# Altium PCB PCB1.PcbDoc
Units mm, origin at the board's own origin, x right, y up, seen from the top; angles counter-clockwise.
Board outline 12 x 15 mm, 4 copper layers (Component Side, Ground Plane, Power Plane, Solder Side), stack 1.494 mm thick; 2 components, 38 nets, 108 pads, 46 vias.
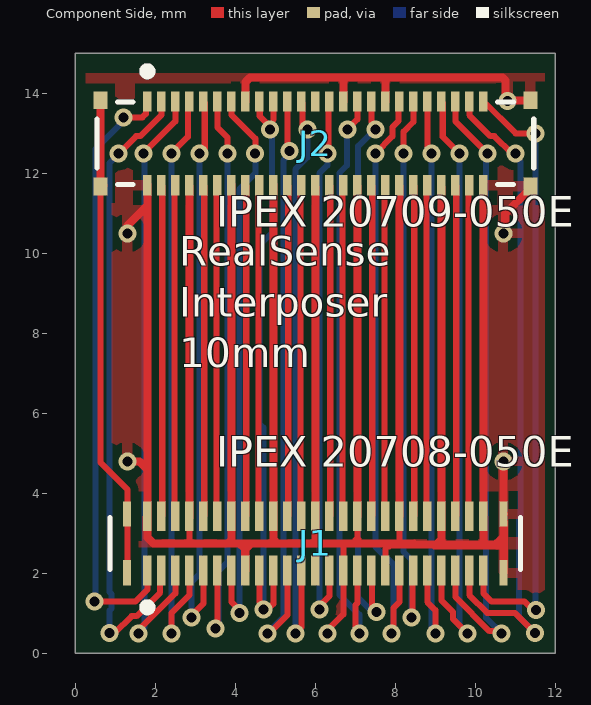
[diagram p0: Component Side view]
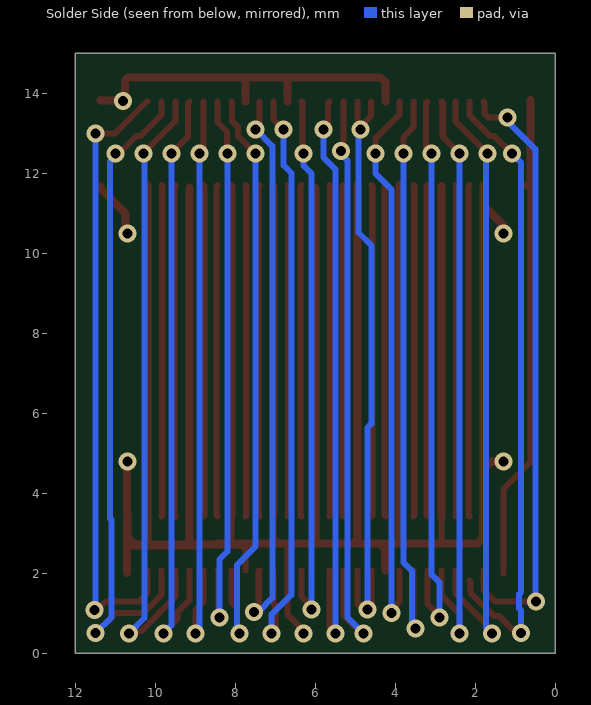
[diagram p1: Solder Side view, seen from below]
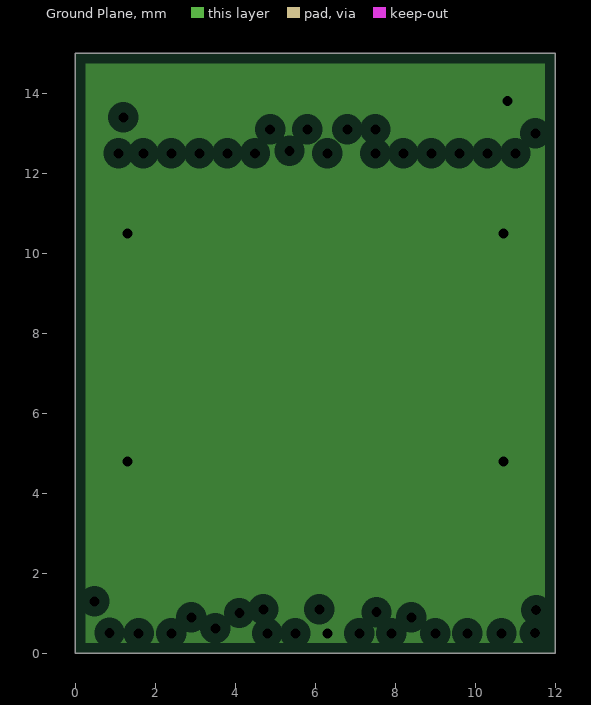
[diagram p2: Ground Plane, clearances drawn from the general rule]
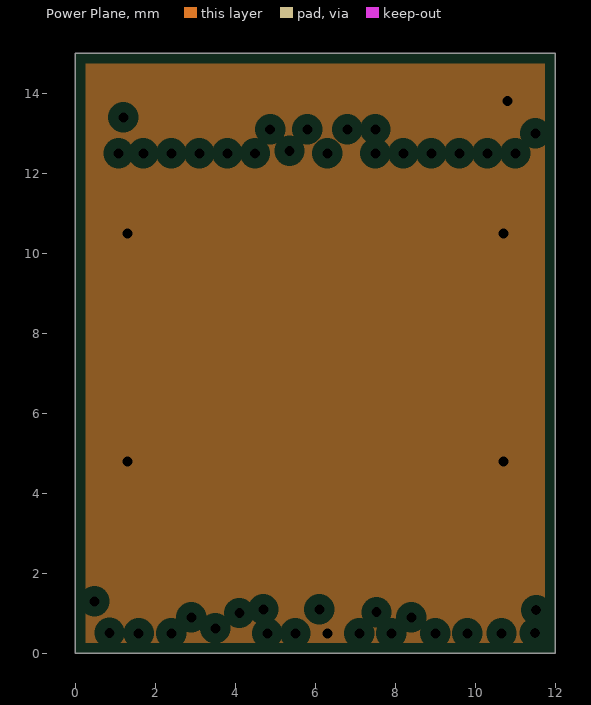
[diagram p3: Power Plane, clearances drawn from the general rule]

## Layer stack, top to bottom
Top Solder: solder mask 0.01, Solder Resist, Dk 3.5
Component Side: signal copper 0.036
Dielectric 1: core 0.11, FR-4, Dk 4.29
Ground Plane: plane copper 0.036, net GND
Dielectric 3: prepreg 1.13, Dk 3.96
Power Plane: plane copper 0.036, net GND
Dielectric 4: core 0.11, FR-4, Dk 4.29
Solder Side: signal copper 0.036
Bottom Solder: solder mask 0.01, Solder Resist, Dk 3.5

## Board outline
0,0 12,0 12,15 0,15

## Design rules (kind name [scope] priority, off if disabled: settings)
BoardOutlineClearance [All] p1: gap=0.254 ignorepadtopadclearanceinfootprint=FALSE except(0: Arc-SplitContinuation Track-SplitContinuation SMDPad-SplitContinuation THPad-SplitContinuation Via-SplitContinuation Fill-SplitContinuation Poly-SplitContinuation Region-SplitContinuation Text-SplitContinuation)
Clearance [All] p1: gap=0.203 ignorepadtopadclearanceinfootprint=TRUE except(0: Arc-Hole Track-Hole SMDPad-Hole THPad-Hole Via-Hole Fill-Hole Poly-Hole Region-Hole Text-Hole; 0.051: Arc-Text Track-Text SMDPad-Text THPad-Text Via-Text Fill-Text Poly-Text Region-Text Text-Text; 0.127: Arc-Arc Arc-Track Arc-SMDPad Arc-THPad Arc-Via Track-Track Track-SMDPad Track-THPad Track-Via SMDPad-SMDPad SMDPad-THPad SMDPad-Via THPad-THPad THPad-Via Via-Via)
DiffPairsRouting DiffPairsRouting_90Ohm [InDifferentialPairClass('MIPI')] p1: maxlimit=0.152 minlimit=0.152 mostfreqgap=0.152 toplayer_minwidth=0.152 toplayer_maxwidth=0.152 toplayer_prefwidth=0.152 bottomlayer_minwidth=0.152 bottomlayer_maxwidth=0.152 bottomlayer_prefwidth=0.152 impedanceprofiledriven=TRUE impedanceprofileid={802129AD-7C31-4A01-A23C-55E1848BF8F3} impedanceprofilevalue=90.000000 maxuncoupledlength=5 // 90 Ohm Edge Coupled Microstrip on outer layers of PCBWay standard 4-layer stackup.
DiffPairsRouting DiffPairsRouting_100Ohm [InDifferentialPairClass('CSIDiff') or InDifferentialPairClass('EthernetDiff') or InDifferentialPairClass('HDMIDiff')] p2: maxlimit=0.254 minlimit=0.254 mostfreqgap=0.254 toplayer_minwidth=0.152 toplayer_maxwidth=0.152 toplayer_prefwidth=0.152 bottomlayer_minwidth=0.152 bottomlayer_maxwidth=0.152 bottomlayer_prefwidth=0.152 impedanceprofiledriven=TRUE maxuncoupledlength=12.7 // 100 Ohm Edge Coupled Microstrip on outer layers of PCBWay standard 4-layer stackup. Saturn PCB calcs.
PlaneClearance [All] p1: clearance=0.254
PlaneConnect [All] p1: planeconnectstyle=Relief reliefexpansion=0.508 reliefentries=4 reliefconductorwidth=0.254 reliefairgap=0.254
PolygonConnect [All] p1: connectstyle=Relief reliefconductorwidth=0.254 reliefentries=4 polygonreliefangle="90 Angle" airgapwidth=0.254
RoutingVias [All] p1: holewidth=0.25 width=0.45 viastyle="Through Hole" minholewidth=0.25 minwidth=0.45 maxholewidth=0.9 maxwidth=1.3
SolderMaskExpansion [All] p1: expansion=0.102 istentingtop=FALSE
Width [All] p1: maxlimit=0.254 minlimit=0.127 preferedwidth=0.152 minimp=50.000000 maximp=50.000000 favimp=50.000000
27 further rules are at their usual default settings.

## Classes and differential pairs
differential pair class MIPI: MC_L MC_R MD0_L MD0_R MD1_L MD1_R RGB_MC RGB_MD0
differential pair RGB_MD0: +RGB_MD0_P -RGB_MD0_N
differential pair RGB_MC: +RGB_MC_P -RGB_MC_N
differential pair MD1_R: +MD1_R_P -MD1_R_N
differential pair MD1_L: +MD1_L_P -MD1_L_N
differential pair MD0_R: +MD0_R_P -MD0_R_N
differential pair MD0_L: +MD0_L_P -MD0_L_N
differential pair MC_R: +MC_R_P -MC_R_N
differential pair MC_L: +MC_L_P -MC_L_N

## Components (designator, comment, footprint, x,y, rotation, side; value= is the part's Value field where it differs from the comment)
J1 "IPEX 20708-050E" IPEX_20708-050E-01 6,2.75 r0 top locked
J2 "IPEX 20709-050E" IPEX_20709-050E-01_20709-050E-01(PRIMARY) 6,12.75 r0 top locked

## Footprints (in the part's own frame and the unit in brackets; to place one, negate y for a bottom-side part, rotate by r counter-clockwise, add the part's x,y. Pads: shape width x height; smd on the part's side, far side on the other; paste and mask are expansions set on the pad)
IPEX_20708-050E-01 [mm]
  rect 0.22x0.745 smd: 1(-4.2,-0.677) 2(-4.2,0.677) 3(-3.85,-0.677) 4(-3.85,0.677) 5(-3.5,-0.677) 6(-3.5,0.677) 7(-3.15,-0.677) 8(-3.15,0.677) 9(-2.8,-0.677) 10(-2.8,0.677) 11(-2.45,-0.677) 12(-2.45,0.677) 13(-2.1,-0.677) 14(-2.1,0.677) 15(-1.75,-0.677) 16(-1.75,0.677) 17(-1.4,-0.677) 18(-1.4,0.677) 19(-1.05,-0.677) 20(-1.05,0.677) 21(-0.7,-0.677) 22(-0.7,0.677) 23(-0.35,-0.677) 24(-0.35,0.677) 25(0,-0.677) 26(0,0.677) 27(0.35,-0.677) 28(0.35,0.677) 29(0.7,-0.677) 30(0.7,0.677) 31(1.05,-0.677) 32(1.05,0.677) 33(1.4,-0.677) 34(1.4,0.677) 35(1.75,-0.677) 36(1.75,0.677) 37(2.1,-0.677) 38(2.1,0.677) 39(2.45,-0.677) 40(2.45,0.677) 41(2.8,-0.677) 42(2.8,0.677) 43(3.15,-0.677) 44(3.15,0.677) 45(3.5,-0.677) 46(3.5,0.677) 47(3.85,-0.677) 48(3.85,0.677) 49(4.2,-0.677) 50(4.2,0.677)
  rect 0.2x0.63 smd: 51(4.71,-0.735) 51(4.71,0.735) 52(-4.71,-0.735) 52(-4.71,0.735)
  silkscreen extent -5.13,-1.7 5.13,0.65, body extent -5.03,-0.9 5.03,0.9, height 0.56
IPEX_20709-050E-01_20709-050E-01(PRIMARY) [mm]
  rect 0.22x0.51 smd: 1(-4.2,1.045) 2(-4.2,-1.045) 3(-3.85,1.045) 4(-3.85,-1.045) 5(-3.5,1.045) 6(-3.5,-1.045) 7(-3.15,1.045) 8(-3.15,-1.045) 9(-2.8,1.045) 10(-2.8,-1.045) 11(-2.45,1.045) 12(-2.45,-1.045) 13(-2.1,1.045) 14(-2.1,-1.045) 15(-1.75,1.045) 16(-1.75,-1.045) 17(-1.4,1.045) 18(-1.4,-1.045) 19(-1.05,1.045) 20(-1.05,-1.045) 21(-0.7,1.045) 22(-0.7,-1.045) 23(-0.35,1.045) 24(-0.35,-1.045) 25(0,1.045) 26(0,-1.045) 27(0.35,1.045) 28(0.35,-1.045) 29(0.7,1.045) 30(0.7,-1.045) 31(1.05,1.045) 32(1.05,-1.045) 33(1.4,1.045) 34(1.4,-1.045) 35(1.75,1.045) 36(1.75,-1.045) 37(2.1,1.045) 38(2.1,-1.045) 39(2.45,1.045) 40(2.45,-1.045) 41(2.8,1.045) 42(2.8,-1.045) 43(3.15,1.045) 44(3.15,-1.045) 45(3.5,1.045) 46(3.5,-1.045) 47(3.85,1.045) 48(3.85,-1.045) 49(4.2,1.045) 50(4.2,-1.045)
  rect 0.35x0.44 smd: 51(5.375,-1.08) 51(5.375,1.08) 52(-5.375,-1.08) 52(-5.375,1.08)
  silkscreen extent -5.46,-1.03 5.46,1.9, body extent -5.46,-1.15 5.46,1.15, height 0.67

## Part data
J1: library part "NOVASTACK 35-P 50 Pin Plug", "50-Pin Plug. Mates with 20709-050E."
J2: library part "NOVASTACK 35-P 50 Pin Receptical", "50-Pin Plug. Mates with 20708-050E."

## Via types
v1: diameter 0.45, hole 0.25, Component Side to Solder Side, tented both sides, 46 vias

## Nets (pads, with @x,y where several pads share a name; then routed paths per layer and width w, separated by ;. In a path a pad name is that pad's centre, name@x,y a point inside that pad or via, vN(x,y) a via of type N, cw(c..) or ccw(c..) an arc to the next point about the centre after c; other vN are vias at no path point)
1: J1.1 J2.1 | length 15.2
  Component Side w0.152: v1(0.479,1.3) 1.509,1.3 1.8,1.591 J1.1 ; v1(1.2,13.4) 1.677,13.4 1.766,13.489 1.766,13.761 J2.1
  Solder Side w0.152: v1(0.479,1.3) 0.5,1.321 0.5,12.606 1.2,13.306 v1(1.2,13.4)
3: J1.3 J2.3 | length 15.9
  Component Side w0.152: v1(0.855,0.51) 0.99,0.51 1.407,0.928 1.532,0.928 2.121,1.517 2.121,1.794 J1.3@2.15,1.823 ; v1(1.079,12.5) 1.094,12.5 1.523,12.928 1.623,12.928 2.15,13.456 J2.3
  Solder Side w0.152: v1(0.855,0.51) 0.855,1.071 0.907,1.123 0.907,1.477 0.855,1.529 0.855,12.262 1.079,12.485 v1(1.079,12.5)
5: J1.5 J2.5 | length 15.6
  Component Side w0.152: v1(1.585,0.5) 1.585,0.585 2.5,1.501 J1.5 ; v1(1.7,12.5) 2.5,13.3 J2.5
  Solder Side w0.152: v1(1.585,0.5) 1.728,0.644 1.728,12.472 v1(1.7,12.5)
7: J1.7 J2.7 | length 15.2
  Component Side w0.152: v1(2.4,0.5) 2.4,1.006 2.85,1.456 J1.7 ; v1(2.4,12.5) 2.813,12.913 2.813,13.758 J2.7
  Solder Side w0.152: v1(2.4,0.5) v1(2.4,12.5)
9: J1.9 J2.9 | length 14.3
  Component Side w0.152: v1(2.9,0.9) 2.9,0.941 3.2,1.241 J1.9 ; v1(3.1,12.5) 3.237,12.637 3.237,13.758 J2.9
  Solder Side w0.152: v1(2.9,0.9) 2.9,1.772 3.1,1.972 v1(3.1,12.5)
11: J1.11 J2.11 | length 14.9
  Component Side w0.152: v1(3.5,0.626) 3.55,0.676 J1.11 ; J2.11 3.55,13.15 3.8,12.9 v1(3.8,12.5)
  Solder Side w0.152: v1(3.5,0.626) 3.579,0.705 3.579,2.057 3.8,2.277 v1(3.8,12.5)
13: J1.13 J2.13 | length 14.4
  Component Side w0.152: J1.13 3.9,1.289 4.1,1.089 v1(4.1,1.009) ; J2.13 3.9,13.464 4.5,12.864 4.5,12.508 v1(4.492,12.5)
  Solder Side w0.152: v1(4.1,1.009) 4.1,11.6 4.5,12 4.5,12.492 v1(4.492,12.5)
21: J1.21 J2.21 | length 15.4
  Component Side w0.152: v1(4.8,0.5) 4.8,0.457 5.3,0.957 J1.21 ; J2.21 5.3,12.618 v1(5.356,12.562)
  Solder Side w0.152: v1(4.8,0.5) 5.2,0.9 5.2,12.325 5.356,12.481 v1(5.356,12.562)
23: J1.23 J2.23 | length 15.1
  Component Side w0.152: v1(5.5,0.5) 5.65,0.65 J1.23 ; J2.23 5.684,13.761 5.684,13.216 v1(5.8,13.1)
  Solder Side w0.152: v1(5.5,0.5) 5.5,12.1 5.8,12.4 v1(5.8,13.1)
27: J1.27 J2.27 | length 13.9
  Component Side w0.152: v1(6.1,1.1) 6.1,1.181 6.35,1.431 J1.27 ; v1(6.3,12.5) 6.325,12.525 6.325,13.77 J2.27
  Solder Side w0.152: v1(6.1,1.1) 6.1,12 6.3,12.2 v1(6.3,12.5)
31: J1.31 J2.31 | length 15.3
  Component Side w0.152: v1(6.8,13.1) 7.05,13.35 J2.31 ; J1.31 7.05,1.256 7.002,1.208 7.002,0.598 v1(7.1,0.5)
  Solder Side w0.152: v1(6.8,13.1) 6.792,13.092 6.792,12.2 6.6,12.008 6.6,1.465 7.1,0.965 v1(7.1,0.5)
33: J1.33 J2.33 | length 14.3
  Component Side w0.152: J1.33 7.415,2.057 7.415,1.12 7.504,1.03 v1(7.528,1.03) ; J2.33 7.4,13.281 7.5,13.181 v1(7.5,13.1)
  Solder Side w0.152: v1(7.5,13.1) 7.494,13.1 7.072,12.677 7.072,1.389 7.43,1.03 v1(7.528,1.03)
37: J1.37 J2.37 | length 15.4
  Component Side w0.152: v1(7.5,12.5) 7.506,12.5 7.928,12.923 7.928,13.156 8.084,13.311 8.084,13.779 J2.37 ; v1(7.9,0.5) 7.956,0.556 7.956,1.135 8.1,1.278 J1.37
  Solder Side w0.152: v1(7.5,12.5) 7.5,2.669 7.956,2.213 7.956,0.556 v1(7.9,0.5)
39: J1.39 J2.39 | length 14.3
  Component Side w0.152: v1(8.2,12.5) 8.208,12.508 8.208,13.04 8.45,13.283 J2.39 ; v1(8.4,0.9) 8.425,0.925 8.425,2.047 J1.39
  Solder Side w0.152: v1(8.2,12.5) 8.2,2.546 8.4,2.346 v1(8.4,0.9)
41: J1.41 J2.41 | length 15
  Component Side w0.152: J1.41 8.8,1.278 9,1.078 v1(9,0.5) ; J2.41 8.8,12.6 v1(8.9,12.5)
  Solder Side w0.152: v1(8.9,12.5) 8.9,0.6 v1(9,0.5)
43: J1.43 J2.43 | length 15.4
  Component Side w0.152: J1.43 9.15,1.323 9.447,1.027 9.447,0.853 v1(9.8,0.5) ; J2.43 9.187,13.758 9.187,12.913 v1(9.6,12.5)
  Solder Side w0.152: v1(9.6,12.5) 9.6,0.7 v1(9.8,0.5)
45: J1.45 J2.45 | length 16
  Component Side w0.152: J1.45 9.5,1.41 10.353,0.557 10.598,0.557 v1(10.655,0.5) ; J2.45 9.5,13.3 v1(10.3,12.5)
  Solder Side w0.152: v1(10.3,12.5) 10.272,12.472 10.272,0.883 v1(10.655,0.5)
47: J1.47 J2.47 | length 16.8
  Component Side w0.152: J1.47 9.85,1.456 10.294,1.011 10.989,1.011 11.489,0.511 v1(11.489,0.509) ; J2.47 9.85,13.456 10.377,12.928 10.477,12.928 10.906,12.5 v1(11,12.5)
  Solder Side w0.152: v1(11,12.5) 11,12.419 11.128,12.291 11.128,3.376 11.093,3.341 11.093,0.905 v1(11.489,0.509)
49: J1.49 J2.49 | length 15.6
  Component Side w0.152: J1.49 10.2,1.501 10.401,1.3 11.225,1.3 11.44,1.085 v1(11.521,1.085) ; J2.49 10.211,13.795 11.006,13 v1(11.5,13)
  Solder Side w0.152: v1(11.5,13) 11.5,1.106 v1(11.521,1.085)
+1v8: J1.17 J1.19 J2.17 J2.19 | length 15.7
  Component Side w0.152: J1.17 4.6,1.286 v1@4.786,1.1 ; J2.17 4.611,13.784 4.611,13.432 v1@4.8,13.244 ; v1(4.7,1.1) v1@4.786,1.1 ; v1@4.8,1 v1@4.8,1.086 ; v1@4.8,13.2 4.872,13.128 v1(4.872,13.1) ; J1.19 4.95,1.236 v1@4.8,1.086 ; 4.95,13.35 J2.19 ; v1@4.786,1.1 v1@4.8,1.086
  Solder Side w0.152: v1(4.7,1.1) 4.7,5.64 4.6,5.74 4.6,10.2 4.921,10.521 4.921,13.051 v1(4.872,13.1)
+3v3: J1.52 J2.52 | length 12.1
  Component Side w0.152: J2.52@0.625,11.67 0.625,4.775 1.3,4.1 J1.52@1.3,2
  Component Side w0.203: J2.52@0.625,13.83 0.625,11.775 J2.52@0.7,11.7
GND: J1.2 J1.8 J1.14 J1.15 J1.20 J1.26 J1.29 J1.32 J1.35 J1.38 J1.44 J1.50 J1.51 J2.2 J2.8 J2.14 J2.15 J2.20 J2.26 J2.29 J2.32 J2.35 J2.38 J2.44 J2.50 J2.51 | length 113.7
  Component Side w0.152: 1.8,2.9 1.808,2.892 1.95,2.75 ; J1.8 2.85,2.767 2.867,2.75 ; 3.783,2.75 3.9,2.867 ; J1.15@4.247,2.075 J1.15 4.284,2.106 4.284,2.604 4.43,2.75 ; 4.95,2.877 5.077,2.75 ; 5.95,2.75 6,2.8 ; v1(6.3,0.5) 6.3,0.577 6.7,0.977 J1.29 6.7,2.7 6.75,2.75 ; 7.05,2.75 7.05,2.85 J1.32 ; J1.35 7.75,2.611 7.839,2.7 8.152,2.7 ; J1.38 8.1,2.8 8.1,2.752 8.102,2.75 8.152,2.7 ; 8.464,2.75 9.025,2.75 ; 9.15,2.875 9.025,2.75 ; 10.2,2.789 10.161,2.75 ; 10.71,2.947 10.7,2.937 10.513,2.75 10.161,2.75 ; 8.152,2.7 8.975,2.7 9.025,2.75 ; 9.025,2.75 10.161,2.75
  Component Side w0.203: v1(1.3,4.8) 1.6,4.8 1.8,4.6 ; v1@1.3,10.7 1.8,11.2 ; 1.8,2.9 1.808,2.892 ; J2.2 1.8,11.2 ; 1.9,2.8 1.808,2.892 ; J1.8@2.85,3.4 J2.8@2.85,11.678 ; 3.9,2.8 3.9,2.867 J1.14 J2.14 ; J1.15@4.247,2.075 4.242,2.081 4.242,2.615 4.107,2.75 ; J2.15 4.25,14.281 4.369,14.4 6.7,14.4 ; J2.20 J1.20 4.95,2.877 4.95,2.85 5,2.8 ; J2.26@6,11.642 J1.26 6,2.8 6,2.75 ; J2.29 6.7,14.4 ; 7,2.8 7.05,2.85 ; J1.32 J2.32@7.05,11.678 ; J2.35 7.75,14.35 7.7,14.4 ; 7.8,2.7 7.839,2.7 ; J1.38 J2.38@8.1,11.678 ; 8.464,2.75 8.102,2.75 7.05,2.75 6.75,2.75 6,2.75 ; 8.975,2.7 10.71,2.7 ; 9.1,2.8 9.15,2.85 9.15,2.875 J1.44 J2.44@9.15,11.642 ; 10.2,2.8 J1.50 J2.50 ; 10.513,2.75 10.581,2.75 ; 10.7,2.8 10.65,2.75 10.581,2.75 ; J1.51@10.7,3.5 J1.51@10.7,3.3 ; v1(10.7,4.8) 10.708,4.792 10.708,3.487 J1.51@10.71,3.485 ; v1(10.7,10.5) 10.747,10.547 10.747,10.997 11.375,11.625 J2.51@11.375,11.67 ; J1.51@10.71,2.015 10.71,2.7 ; v1@10.8,13.8 10.758,13.842 10.758,14.323 10.681,14.4 7.7,14.4 ; v1(10.806,13.806) 10.818,13.818 11.363,13.818 J2.51@11.375,13.83 ; 1.8,4.6 1.8,11.2 ; 1.8,4.6 J1.2 1.808,3.419 1.808,2.892 ; 1.808,2.892 1.95,2.75 2.867,2.75 3.783,2.75 4.107,2.75 ; 4.107,2.75 4.43,2.75 5.077,2.75 5.95,2.75 6,2.75 ; 6.7,14.4 7.7,14.4 ; 10.581,2.75 10.7,2.869 10.7,2.937 J1.51@10.7,3.3 ; J1.51@10.7,3.3 10.71,3.29 10.71,2.947 10.71,2.7
  other v1: 1.3,10.5
MC_L_N: J1.24 J2.24 | length 8.3
  Component Side w0.152: J1.24 5.627,3.45 5.627,11.682 J2.24
MC_L_P: J1.22 J2.22 | length 8.3
  Component Side w0.152: J1.22 5.323,3.45 5.323,11.682 J2.22
MC_R_N: J1.42 J2.42 | length 8.3
  Component Side w0.152: J1.42 8.777,3.45 8.777,11.682 J2.42
MC_R_P: J1.40 J2.40 | length 8.3
  Component Side w0.152: J1.40 8.473,3.45 8.473,11.682 J2.40
MD0_L_N: J1.18 J2.18 | length 8.3
  Component Side w0.152: J1.18 4.577,3.45 4.577,11.682 J2.18
MD0_L_P: J1.16 J2.16 | length 8.3
  Component Side w0.152: J1.16 4.273,3.45 4.273,11.682 J2.16
MD0_R_N: J1.36 J2.36 | length 8.3
  Component Side w0.152: J1.36 7.727,3.45 7.727,11.682 J2.36
MD0_R_P: J1.34 J2.34 | length 8.3
  Component Side w0.152: J1.34 7.423,3.45 7.423,11.682 J2.34
MD1_L_N: J1.30 J2.30 | length 8.3
  Component Side w0.152: J1.30 6.677,3.45 6.677,11.682 J2.30
MD1_L_P: J1.28 J2.28 | length 8.3
  Component Side w0.152: J1.28 6.373,3.45 6.373,11.682 J2.28
MD1_R_N: J1.48 J2.48 | length 8.3
  Component Side w0.152: J1.48 9.827,3.45 9.827,11.682 J2.48
MD1_R_P: J1.46 J2.46 | length 8.3
  Component Side w0.152: J1.46 9.523,3.45 9.523,11.682 J2.46
RGB_MC_N: J1.12 J2.12 | length 8.3
  Component Side w0.152: J1.12 3.527,3.45 3.527,11.682 J2.12
RGB_MC_P: J1.10 J2.10 | length 8.3
  Component Side w0.152: J1.10 3.223,3.45 3.223,11.682 J2.10
RGB_MD0_N: J1.6 J2.6 | length 8.3
  Component Side w0.152: J1.6 2.477,3.45 2.477,11.682 J2.6
RGB_MD0_P: J1.4 J2.4 | length 8.3
  Component Side w0.152: J1.4 2.173,3.45 2.173,11.682 J2.4
pads on no net: J1.25 J2.25

## Polygon pours and split planes (outlines as drawn)
GND on Component Side "Component Side-GND" (solid, remove dead copper, pour order 0): 0,0 12,0 12,14.5 0,14.5
GND on Ground Plane (split plane): 11.744,0.256 0.256,0.256 0.256,14.744 11.744,14.744
GND on Power Plane (split plane): 11.744,0.256 0.256,0.256 0.256,14.744 11.744,14.744

## Silkscreen, mask and mechanical layers (free items; w line width, h text height)
Top Overlay:
  text "RealSense  / Interposer / 10mm" at 2.6,6.9 h1.27
Mechanical 1:
  the board outline again, w0.1

## Dimensions
0,15 to 0,0 on Mechanical 13
0,0 to 12,0 on Mechanical 13
6.05,2.75 to 6.05,12.75 on Top Overlay